# Altium PCB nRF52_UWB_MPU_MPU_new.pcbdoc
Units mil, origin at the board's own origin, x right, y up, seen from the top; angles counter-clockwise.
Board outline 2921.31 x 2303.67 mil, 2 copper layers (Top Layer, Bottom Layer); 31 components, 31 nets, 182 pads, 77 vias.
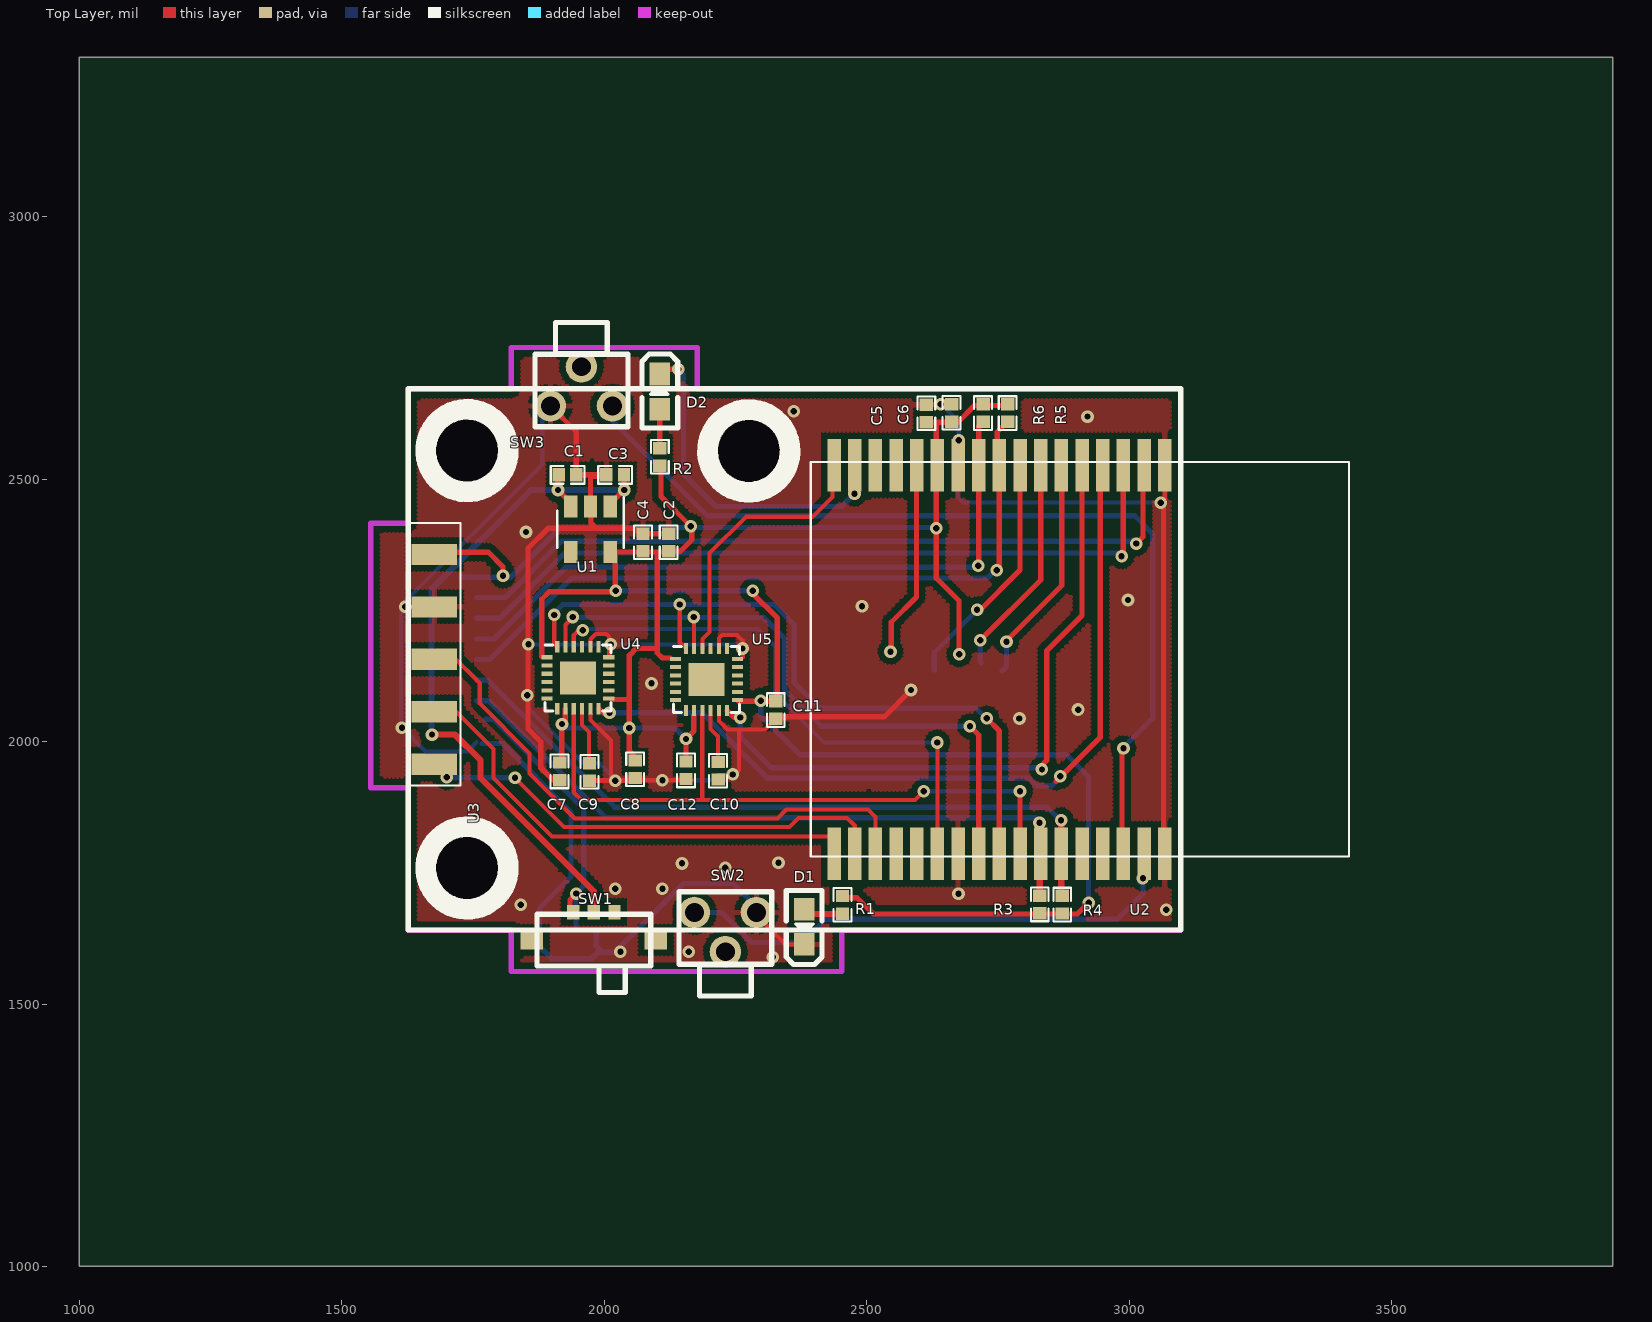
[diagram p0: Top Layer view]
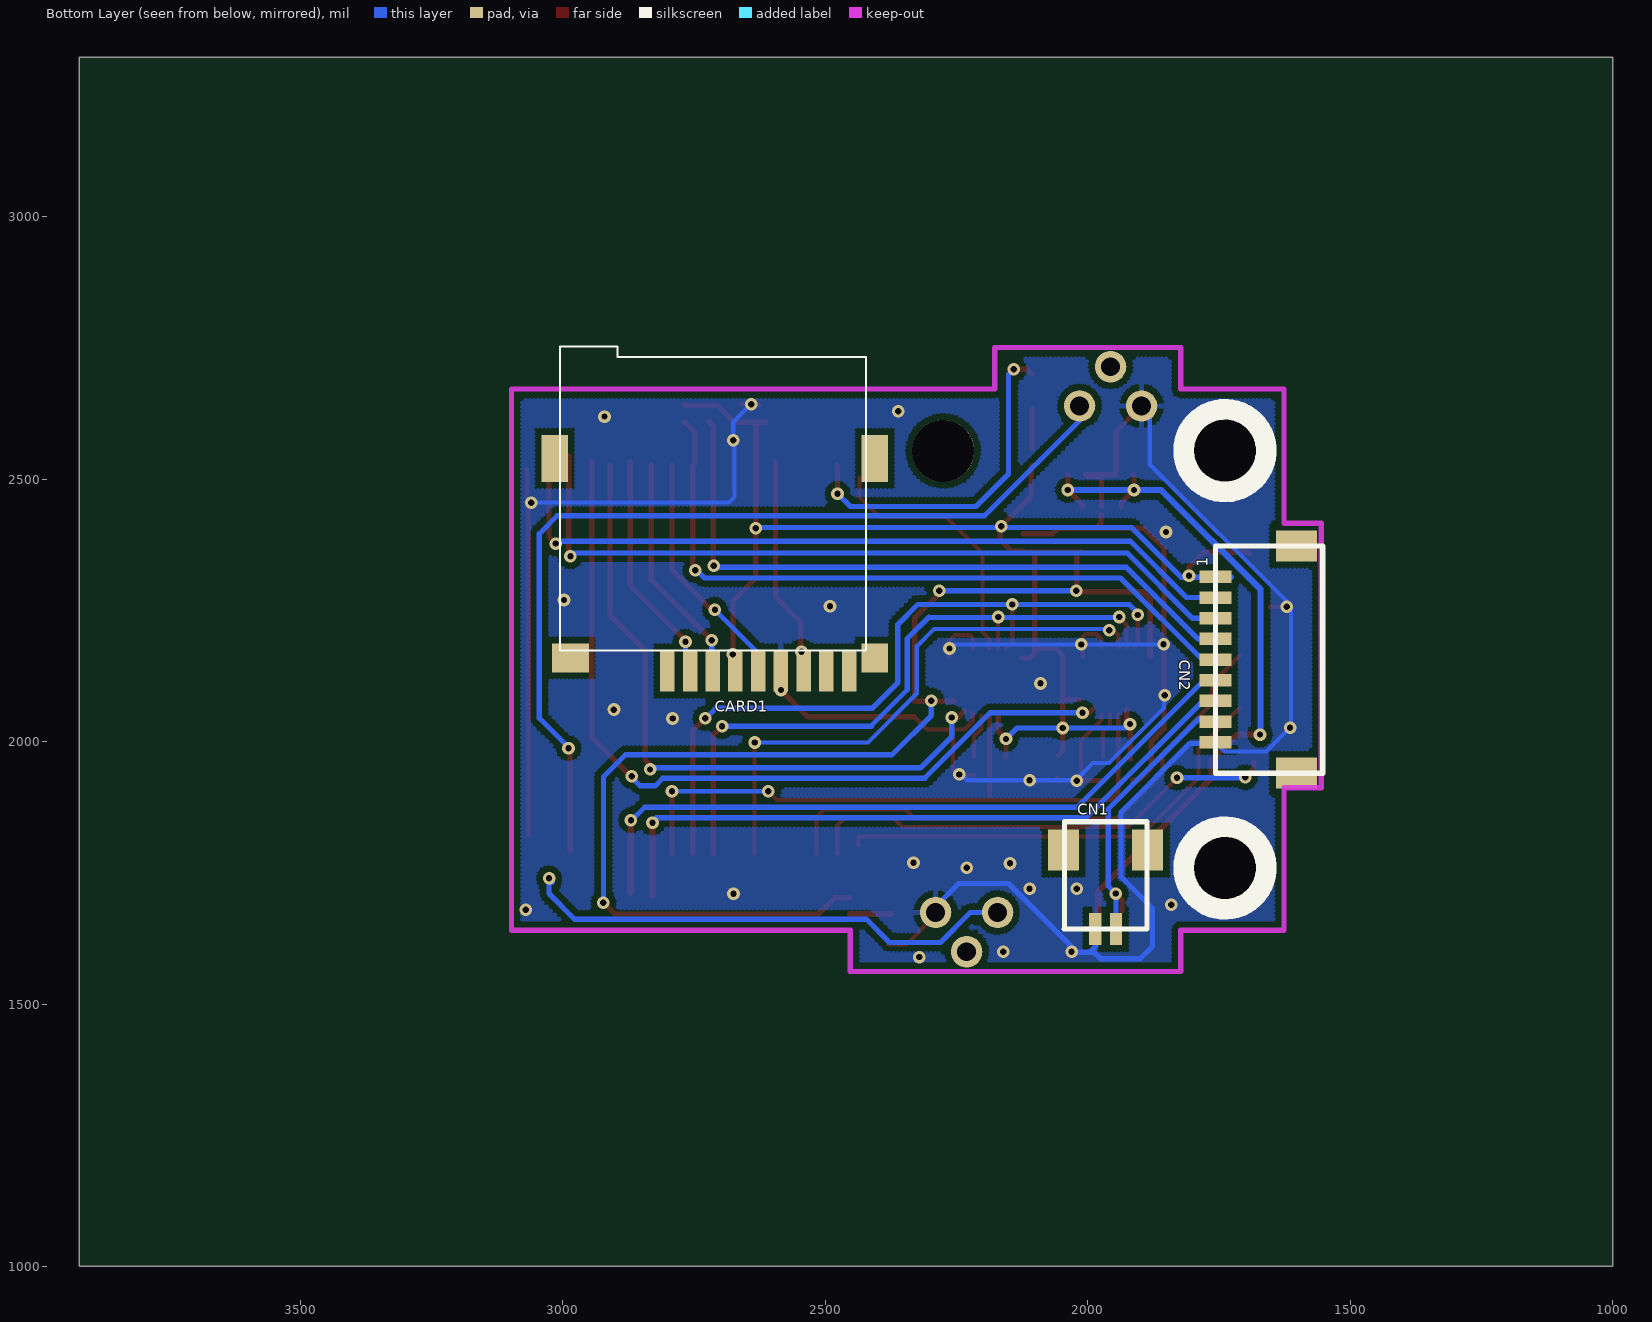
[diagram p1: Bottom Layer view, seen from below]

## Layer stack, top to bottom
Top Layer: signal copper 1.4
Dielectric: dielectric 12.6, FR-4, Dk 4.8
Bottom Layer: signal copper 1.4

## Board outline
3921.31,1000 1000,1000 1000,3303.67 3921.31,3303.67

## Design rules (kind name [scope] priority, off if disabled: settings)
Clearance Clearance_1 [(InPolygon)] p1: gap=11.81
Clearance [All] p2: gap=5.98
ComponentClearance [All] p1 off: gap=10 collisioncheckmode=3 verticalgap=10
PolygonConnect [isvia] p1: connectstyle=Direct reliefconductorwidth=10 reliefentries=4 polygonreliefangle="90 Angle"
RoutingVias [All] p1: holewidth=27.99 width=50 viastyle="Through Hole" minholewidth=11.81 minwidth=23.62 maxholewidth=27.99 maxwidth=50
SolderMaskExpansion [All] p1: expansion=4
TestPointUsage [All] p1: valid=0 allowmultiple=FALSE
Testpoint [All] p1: side=15 testpointundercomponent=TRUE minsize=40 maxsize=100 preferedsize=60 minholesize=0 maxholesize=40 preferedholesize=32 testpointgrid=1 style=1023 order=0123456789
Width Width_2 [InNet('VCC3.3')] p1: maxlimit=100 minlimit=10 preferedwidth=10 minimp=50.000000 maximp=50.000000 favimp=50.000000
Width Width_1 [InNet('VCC3.7')] p2: maxlimit=100 minlimit=10 preferedwidth=10 minimp=50.000000 maximp=50.000000 favimp=50.000000
Width [All] p3: maxlimit=100 minlimit=6 preferedwidth=10 minimp=50.000000 maximp=50.000000 favimp=50.000000
18 further rules are at their usual default settings.

## Components (designator, comment, footprint, x,y, rotation, side; value= is the part's Value field where it differs from the comment)
C1 "10uF" 0402#1 1929.81,2508.41 r180 top
C2 "10uF" 0402#1 2122.81,2379.41 r270 top
C3 "100nF" 0402#1 2020.81,2508.41 r0 top
C4 "100nF" 0402#1 2073.81,2379.41 r270 top
C5 "10uF" 0402#1 2613.81,2625.41 r270 top
C6 "100nF" 0402#1 2661.81,2626.41 r270 top
C7 "10nF" 0402#1 1914.81,1943.41 r90 top
C8 "100nF" 0402#1 2058.81,1947.41 r90 top
C9 "100nF" 0402#1 1971.81,1942.41 r270 top
C10 "100nF" 0402#1 2216.81,1944.41 r270 top
C11 "100nF" 0402#1 2326.81,2060.41 r90 top
C12 "10nF" 0402#1 2155.81,1945.41 r90 top
CARD1 "HYC77-TF09-200" TF-015 2710.81,2337.05 r180 bottom locked
CN1 "A1002WV-S-2P" A1002WR-S-2P_LEO 1965.74,1718.53 r180 bottom
CN2 "A1002WR-S-9P" A1002WR-S-9P_LEO 1680.9,2156.34 r270 bottom
D1 "RED" LED-0603 2380.81,1647.01 r90 top
D2 "GREEN" LED-0603 2105.81,2667.01 r270 top
R1 "1K" 0402#1 2454,1689 r270 top
R2 "200" 0402#1 2105.81,2542.41 r270 top
R3 "10K" 0402#1 2829.81,1689.41 r270 top
R4 "10K" 0402#2 2872.77,1689.17 r270 top
R5 "10K" 0402#1 2768.81,2626.41 r90 top
R6 "10K" 0402#1 2721.81,2626.41 r90 top
SW1 "SSAJ120100" SW-SMD-5.5X2.5 1980.14,1648.43 r0 top
SW2 "KAN4562-0501C" KAN4562-0501C 2230.81,1637.01 r0 top
SW3 "KAN4562-0501C" KAN4562-0501C 1956.51,2677.01 r180 top
U1 "SPX3819M5-L-3-3/TR" SOT-23-5 1973.81,2404.41 r270 top
U2 "DWM1001" DWM1001 2905.41,2156.31 r270 top locked
U3 "GPS_Header" GPS_HEADER_SMT_NEW 1626.34,1641.14 r90 top locked
U4 "MPU-9250" QFN-24-1EP_3X3MM_PITCH0.4MM 1949.81,2121.41 r0 top
U5 "MPU-9250" QFN-24-1EP_3X3MM_PITCH0.4MM 2194.81,2118.41 r0 top

## Footprints (in the part's own frame and the unit in brackets; to place one, negate y for a bottom-side part, rotate by r counter-clockwise, add the part's x,y. Pads: shape width x height; smd on the part's side, far side on the other; paste and mask are expansions set on the pad)
0402#1 [mil]
  rect 23.6x25.6 smd: 1(-16.7,0) 2(16.7,0)
  silkscreen extent -32,-17 32,17
0402#2 [mil]
  rect 23.7x25.6 smd: 1(-16.7,0) 2(16.7,0)
  silkscreen extent -32,-17 32,17
A1002WR-S-2P_LEO [mil]
  rect 23.6x61 smd: 1(-19.77,-75.78) 2(19.63,-75.78)
  rect 59.1x78.8 smd: 3(-80.02,74.97) 4(79.98,74.97)
  silkscreen extent -79,-76 79,129
A1002WR-S-9P_LEO [mil]
  rect 23.6x61 smd: 1(-157.51,-75.71) 2(-118.11,-75.71) 3(-78.61,-75.81) 4(-39.41,-75.71) 5(-0.01,-75.71) 6(39.39,-75.71) 7(78.69,-75.71) 8(118.14,-75.71) 9(157.49,-75.71)
  rect 59.1x78.7 smd: 10(-216.51,78.74)
  rect 59x78.7 smd: 11(216.54,78.74)
  silkscreen extent -217,-76 217,129
DWM1001 [mm]
  rect 2.54x0.65 smd: 1(-9.404,4.129) 2(-9.404,3.129) 3(-9.404,2.129) 4(-9.404,1.129) 5(-9.404,0.129) 6(-9.404,-0.871) 7(-9.404,-1.871) 8(-9.404,-2.871) 9(-9.404,-3.871) 10(-9.404,-4.871) 11(-9.404,-5.871) 12(-9.404,-6.871) 13(-9.404,-7.871) 14(-9.404,-8.871) 15(-9.404,-9.871) 16(-9.404,-10.871) 17(-9.404,-11.871) 18(9.406,-11.871) 19(9.406,-10.871) 20(9.406,-9.871) 21(9.406,-8.871) 22(9.406,-7.871) 23(9.406,-6.871) 24(9.406,-5.871) 25(9.406,-4.871) 26(9.406,-3.871) 27(9.406,-2.871) 28(9.406,-1.871) 29(9.406,-0.871) 30(9.406,0.129) 31(9.406,1.129) 32(9.406,2.129) 33(9.406,3.129) 34(9.406,4.129)
  silkscreen extent -9.56,-13.02 9.54,13.05
GPS_HEADER_SMT_NEW [mm]
  rect 1.02x2.2 smd: 1(18.18,-1.27) 2(15.64,-1.27) 3(13.1,-1.27) 4(10.56,-1.27) 5(8.02,-1.27)
  round 3 hole 3 unplated: ""(3,-2.85) ""(23.2,-2.85)
  silkscreen extent 0,-37.4 26.2,0
KAN4562-0501C [mil]
  round 60 hole 36: 0(0,-37.4) 1(-59.05,37.4) 2(59.06,37.4)
  silkscreen extent -89,-122 89,77
LED-0603 [mil]
  rect 43x39 smd: 1(33.5,0) 2(-33.5,0)
  silkscreen extent -72,-34 70,34
QFN-24-1EP_3X3MM_PITCH0.4MM [mil]
  rect 21.65x7.87 smd: 1(-59.05,39.35) 2(-59.05,23.65) 3(-59.05,7.85) 4(-59.05,-7.85) 5(-59.05,-23.65) 6(-59.05,-39.35) 13(59.05,-39.35) 14(59.05,-23.65) 15(59.05,-7.85) 16(59.05,7.85) 17(59.05,23.65) 18(59.05,39.35)
  rect 7.87x21.65 smd: 7(-39.35,-59.05) 8(-23.65,-59.05) 9(-7.85,-59.05) 10(7.85,-59.05) 11(23.65,-59.05) 12(39.35,-59.05) 19(39.35,59.05) 20(23.65,59.05) 21(7.85,59.05) 22(-7.85,59.05) 23(-23.65,59.05) 24(-39.35,59.05)
  rect 34.45x31.5 smd: 25(-17.1,-15.75) 25(-17.1,15.75) 25(17.15,-15.75) 25(17.15,15.75)
  silkscreen extent -63,-63 63,63
SOT-23-5 [mm]
  rect 1.06x0.65 smd: 1(-1.1,0.95) 2(-1.1,0) 3(-1.1,-0.95) 4(1.1,-0.95) 5(1.1,0.95)
  silkscreen extent -1.55,-1.61 0.9,1.61
SW-SMD-5.5X2.5 [mm]
  rect 0.599x0.701 smd: 1(-0.999,0.675) 2(1,0.675) C(-0.001,0.675)
  rect 1.1x0.9 smd: 4(-2.999,-0.675) 5(3,-0.675)
  silkscreen extent -2.75,-3.22 2.75,0.58
TF-015 [mil]
  rect 27.6x78.8 smd: 1(-90.2,-202.55) 4(39.5,-202.55) 5(82.8,-202.55) 6(126,-202.55) 7(169.2,-202.55) 8(212.4,-202.55) 9(255.9,-202.55)
  rect 27.5x78.7 smd: 2(-46.95,-202.5)
  rect 27.5x78.8 smd: 3(-3.75,-202.55)
  rect 50x55 smd: 10(305,-177.4)
  rect 50x90 smd: 11(305,202.6) 12(-305,202.6)
  rect 70x55 smd: 13(-275,-177.44)
  silkscreen extent -295,-163 288,416

## Free pads (board coordinates)
  round 118.11 hole 118.1 unplated: ""(2275.42,2553.94)

## Via types
v1: diameter 24.02, hole 12.01, Top Layer to Bottom Layer, 70 vias
v2: diameter 24.41, hole 12.01, Top Layer to Bottom Layer, 7 vias

## Nets (pads, with @x,y where several pads share a name; then routed paths per layer and width w, separated by ;. In a path a pad name is that pad's centre, name@x,y a point inside that pad or via, vN(x,y) a via of type N, cw(c..) or ccw(c..) an arc to the next point about the centre after c; other vN are vias at no path point)
BUTTON_RST: SW2.1 U2.33 | length 953.7
  Bottom Layer w10: SW2.1 2223.77,1674.45 2280.81,1617.41 2377.81,1617.41 2421.81,1661.41 2977.81,1661.41 3026.81,1710.41 v1@3026.81,1738.41
  Bottom Layer w11.81: v1@3020.81,1732.41 v1@3026.81,1738.41
  other v1: 3026.46,1739.41
BUTTON_SDCARD: SW3.1 U2.32 | length 1779.5
  Top Layer w10: U2.32@2986.81,1790.41 v1@2986.81,1993.41
  Bottom Layer w10: SW3.1 2015.57,2611.43 2196.59,2430.41 3010.81,2430.41 3045,2396.22 3045,2044.6 v1@2989.81,1989.41
  other v1: 2989.46,1987.41
CHARGE_VC: CN1.2 CN2.8 SW1.1 | length 530.6
  Top Layer w10: SW1.1@1934.81,1677.41 1934.81,1698.41 v1@1946.81,1710.41
  Bottom Layer w10: CN2.8@1773.81,2042.41 1789.81,2042.41 1960.81,1871.41 1960.81,1725.11 1946.11,1710.41 CN1.2
  other v1: 1946.46,1710.41
D2_1: D2.1 R2.1 | length 74.4
  Top Layer w10: R2.1 D2.1@2105.81,2633.55
FOOT_2: CN2.4 R6.1 U2.10 | length 1293.5
  Top Layer w10: v1@2713.56,2332.41 2713.56,2601.46 R6.1
  Bottom Layer w10: CN2.4 1790.15,2195.75 1926.81,2332.41 v1@2712.81,2332.41
  other v1: 2712.81,2335.41
FOOT_5: CN2.5 R5.1 U2.9 | length 1349.4
  Top Layer w10: U2.9@2748.81,2527.41 2748.81,2589.71 R5.1 ; v1@2752.91,2326.41 U2.9@2752.91,2526.55
  Bottom Layer w10: CN2.5 1781.75,2156.35 1937.4,2312 2730.4,2312 v1@2744.81,2326.41
  other v1: 2747.81,2326.41
FOOT_6: CN2.6 R4.1 U2.29 | length 1365.8
  Top Layer w11.81: v1@2869.81,1851.41 2870.81,1850.41 R4.1@2870.81,1711.41
  Bottom Layer w10: CN2.6 1778.27,2116.95 2020.22,1875 2844.22,1875 v1@2870.81,1848.41
  other v1: 2870.46,1850.41
FOOT_7: CN2.7 R3.1 U2.28 | length 1310.7
  Top Layer w11.81: R3.1 v1@2829.81,1845.41
  Bottom Layer w10: CN2.7 1780.57,2077.65 2003.22,1855 2822.22,1855 v1@2831.81,1845.41
  other v1: 2829.46,1845.41
GND: C1.1 C2.1 C3.1 C4.1 C5.1 C6.1 C7.1 C8.1 C9.2 C10.2 C11.1 C12.1 CARD1.6 CN1.1 CN2.9 D1.2 SW2.2 SW3.2 U1.2 U2.1 U2.11 U2.24 U2.34 U3.2 U4.11 U4.18 U4.20 U5.11 U5.18 U5.20 | length 6577.8
  Top Layer w7.87: v1@1614.81,2026.41 v1@1615.81,2027.41 ; v1(1621,2257) U3.2@1653,2257 ; U4.20 1973.46,2195.06 1983.81,2205.41 2003.81,2205.41 2008.81,2200.41 U4.18@2008.81,2161.41 ; U4.11@1973.81,2052.41 1973.81,2041.41 2012.81,2002.41 v1@2012.81,1925.71 ; C8.1@2062.81,1926.41 C12.1@2165.81,1926.41 ; C10.2@2216.81,1936.71 2248.11,1936.71 2256.81,1945.41 2256.81,2023 ; U5.20 2218.46,2197.06 2224.81,2203.41 2252.81,2203.41 2263.81,2192.41 U5.18@2263.81,2160.41 ; U5.11@2218.71,2054.69 2218.71,2039.51 2235.22,2023 2306.4,2023 C11.1@2330.81,2047.41 ; SW2.2@2294.81,1664.41 2345.67,1613.55 D1.2@2380.81,1613.55 ; C5.1@2624.81,2640.41 2627.51,2643.11 C6.1 ; U2.11@2673.81,2576.41 2675.81,2574.41 U2.11@2675.81,2480.41 ; v1@3060.81,2454.41 3068.81,2462.41 U2.1@3068.81,2519.41
  Top Layer w10: SW3.2@1897.46,2639.65 1946.51,2590.6 C1.1 C3.1 2001.11,2505.41 1972.81,2505.41 1973.81,2504.41 U1.2 ; C7.1 1902.51,1926.71 1878.81,1950.41 1878.81,2000.41 1854.81,2024.41 1854.81,2368.41 1892.81,2406.41 2056.81,2406.41 2067.11,2396.11 C2.1 ; C9.2 2053.81,1925.71 C8.1 ; U1.2@1973.81,2432.41 1974.81,2431.41 1974.81,2416.41 1984.81,2406.41 ; C11.1@2330.81,2047.41 2533.81,2047.41 v1@2584.81,2098.41 ; v1(3060.46,2455.41) 3065.81,2450.06 U2.34@3065.81,1821.41
  Bottom Layer w7.87: CN2.9 1739.17,1981.41 1659.81,1981.41 1612.81,2028.41 1612.81,2259.41 1881.81,2528.41 1881.81,2624 SW3.2@1897.46,2639.65 ; v1@1853.81,2088.41 1854.58,2087.64 1854.58,2064.41 1959.58,1959.41 1989.81,1959.41 2022.81,1926.41 2229.81,1926.41 v1@2241.81,1938.41 ; v1@1855.81,2185.41 2255.46,2185.41 v1(2263.46,2177.41) ; v1(2641.46,2643.11) 2675.46,2609.11 v1(2675.46,2574.41) 2672.81,2571.76 2672.81,2466.41 2683.81,2455.41 v1(3060.46,2455.41)
  Bottom Layer w10: CN2.9@1766.81,1996.41 1805.81,1996.41 1936.81,1865.41 1936.81,1742.41 1876.81,1682.41 1876.81,1609.41 1899.81,1586.41 1975.81,1586.41 1987.81,1598.41 2019.81,1598.41 2150.81,1729.41 2245.81,1729.41 SW2.2@2290.81,1684.41 ; CN1.1@1984.81,1639.41 1984.81,1610.41 1996.81,1598.41 ; SW2.2@2281.81,1655.41 SW2.2@2288.81,1662.41
  other v1: 2320.81,1589.41 2030.81,1599.41 2160.81,1599.41 3070.81,1679.41 1840.81,1689.41 2675,1710 2020.81,1719.41 2110.81,1719.41 2230.81,1759.41 2020.81,1925.71 2110.81,1926.41 2244.9,1937.5 1614.46,2026.41 1853.46,2088.41 2584.46,2098.41 1855.46,2185.41 2012.54,2185.23 1850.81,2399.41 2920.81,2619.41 2360.81,2629.41
  other v2: 2148,1768 2332,1769 2791,2044 2902.99,2060.98 2090,2111 2491,2258 2998,2270
GPS_1PPS: U2.19 U3.5 | length 916.1
  Top Layer w7.87: v1@1834.81,1926.19 1923.59,1837.41 2352.81,1837.41 2369.81,1854.41 2462.81,1854.41 2477.31,1839.91 U2.19@2477.31,1786.05
  Top Layer w10: U3.5@1683,1961 1683,1949 v1(1700,1932)
  Bottom Layer w10: v1@1697,1933 1699,1931 v1(1830,1931)
GPS_UART_RX: U2.18 U3.4 | length 877.8
  Top Layer w7.87: U3.4@1710,2065 1789,1986 1789,1931 1900.59,1819.41 2436.81,1819.41 U2.18@2436.81,1802.41
GPS_UART_TX: U2.20 U3.3 | length 1065
  Top Layer w7.87: U3.3@1709,2165 1762.81,2111.19 1762.81,2072.41 1857.81,1977.41 1857.81,1939.41 1943.81,1853.41 2329.81,1853.41 2346.81,1870.41 2502.81,1870.41 2516.71,1856.51 U2.20@2516.71,1786.05
INT_IMUA: U2.4 U4.12 | length 1593
  Top Layer w10: U4.12@1990.44,2062.36 1997.8,2055 v1(2010,2055) ; 2861,1924 2945,2008 U2.4@2945,2534
  Bottom Layer w10: v1(2010,2055) 2186,2055 2310.8,1930.2 2809.8,1930.2 2824,1916 2853,1916 v1@2870.72,1933.72
  other v1: 2869,1934
INT_IMUB: U2.5 U5.12 | length 1262.1
  Top Layer w10: U5.12 2247.52,2046 v1@2250,2046 ; v1@2830,1951 2843,1964 2843,2173 2910.48,2240.48 U2.5
  Bottom Layer w10: v1(2259,2046) 2259,2010 2319,1950 v1@2830,1950
  other v1: 2834,1947
LED_R: D2.2 U2.16 | length 658.3
  Top Layer w10: D2.2@2105.81,2700.55 2114.67,2709.41 v1(2140.81,2709.41) ; v1(2476.81,2472.41) 2476.81,2526.05 U2.16@2477.31,2526.55
  Bottom Layer w10: v1(2140.81,2709.41) 2150.81,2699.41 2150.81,2510.19 2213,2448 2452.4,2448 v1(2476.81,2472.41)
MPU92_CLK: U2.25 U4.23 U5.23 | length 1269.6
  Top Layer w7.87: U4.23 1926.16,2222.76 v1@1939.81,2236.41 ; U5.23 v1@2171.16,2237.41
  Top Layer w10: v1(2696.81,2029.41) 2713.56,2012.66 U2.25
  Bottom Layer w10: v1@1939.81,2236.41 2300.56,2236.41 ; 2302.56,2237.41 2343.81,2196.16 2343.81,2098.95 2412.58,2030.18 ; 2412.58,2029.41 v1(2696.81,2029.41)
  other v1: 1939.81,2237.41 2170.81,2237.41
MPU92_MISO: U2.27 U4.9 U5.9 | length 1293.1
  Top Layer w7.87: 1941.81,2051.41 1941.81,1903.41 1956.81,1888.41 2591.81,1888.41 v1(2608.81,1905.41) ; 2186.81,1888.41 U5.9@2186.81,2050.41
  Top Layer w10: U2.27@2792.31,1786.05 v1(2792.31,1905.41)
  Bottom Layer w7.87: v1(2608.81,1905.41) v1(2792.31,1905.41)
MPU92_MOSI: U2.26 U4.24 U5.24 | length 1416.8
  Top Layer w7.87: v1(1904.81,2241.41) 1904.81,2186.11 U4.24 ; v1@2143.81,2269.41 2143.81,2189.06 2155.41,2177.46 U5.24
  Top Layer w10: v1(2728.81,2044.41) 2752.91,2020.31 U2.26@2752.91,1786.05
  Bottom Layer w10: v1@1902.81,2243.41 1920.81,2261.41 2323.81,2261.41 2361.81,2223.41 2361.81,2112.41 2410.81,2063.41 2708.81,2063.41 2727.81,2044.41 v1(2728.81,2044.41)
  other v1: 2143.81,2261.41
MPU92_NCS: U2.23 U4.22 | length 1076.8
  Top Layer w7.87: U4.22 1941.96,2203.1 1953.27,2214.41 v1@1960.81,2214.41 ; U2.23@2634.81,1786.05 v1(2634.81,1998.41)
  Bottom Layer w7.87: v1@1958.81,2214.41 2293.03,2214.41 2325.81,2181.63 2325.81,2091.5 2418.9,1998.41 v1(2634.81,1998.41)
  other v1: 1958.81,2212.41
MPU92B_NCS: U2.17 U5.22 | length 503
  Top Layer w7.87: U5.22 2186.96,2195.34 2200.81,2209.19 2200.81,2359.41 2269.81,2428.41 2396.81,2428.41 2434.81,2466.41 U2.17@2434.81,2503.41
R1_2: D1.1 R1.2 | length 77
  Top Layer w11.81: D1.1@2375.81,1671.41 R1.2@2452.81,1671.41
SDCARD_CLK: CARD1.5 U2.8 | length 459.6
  Top Layer w10: v1@2713.81,2248.41 2792.31,2326.91 U2.8@2792.31,2526.55
  Bottom Layer w10: CARD1.5@2628.81,2136.41 2628.81,2169.41 v1@2710.81,2251.41
  other v1: 2710.46,2251.41
SDCARD_MISO: CARD1.7 U2.13 | length 383.1
  Top Layer w10: v1@2543.81,2172.41 2546.81,2175.41 2546.81,2227.41 2594.81,2275.41 U2.13@2594.81,2534.41
  other v1: 2545.46,2171.41
SDCARD_MOSI: CARD1.3 U2.7 | length 424.3
  Top Layer w10: v1@2716.81,2193.41 2831.71,2308.31 U2.7
  Bottom Layer w10: v1(2716.46,2193.41) 2716.46,2151.76 CARD1.3@2717.81,2150.41
SDCARD_NCS: CARD1.2 U2.6 | length 446.8
  Top Layer w10: v1@2764.81,2190.41 2871.81,2297.41 U2.6@2871.81,2533.41
  Bottom Layer w10: CARD1.2 2766.46,2143.25 v1(2766.46,2190.41)
SWD_CLK: CN2.2 U2.2 | length 1473.7
  Top Layer w10: v1(3013.81,2377.41) 3026.81,2390.41 U2.2@3026.81,2541.41
  Bottom Layer w10: CN2.2 1811.57,2274.45 1919.12,2382 v1@3007.1,2382 ; v1@3007.22,2384 v1(3013.81,2377.41)
SWD_DIO: CN2.3 U2.3 | length 1471.7
  Top Layer w10: v1@2988.81,2353.41 U2.3@2988.81,2544.41
  Bottom Layer w10: CN2.3 1800.35,2234.95 1924.81,2359.41 v1@2985.81,2359.41
  other v1: 2985.81,2353.41
U4_10: C9.1 U4.10 | length 88.7
  Top Layer w7.87: U4.10@1957.71,2052.69 1957.71,2031.51 1970.81,2018.41 C9.1@1970.81,1969.41
U5_10: C10.1 U5.10 | length 84.4
  Top Layer w7.87: U5.10@2202.71,2048.69 2202.71,2024.21 2216.81,2010.11 C10.1@2216.81,1970.11
VCC3.3: C2.2 C4.2 C5.2 C6.2 C7.2 C8.2 C11.2 C12.2 CARD1.4 CN2.1 R1.1 R2.2 R3.2 R4.2 R5.2 R6.2 U1.5 U2.12 U3.1 U4.1 U4.8 U4.13 U5.1 U5.8 U5.13 | length 5336.4
  Top Layer w7.87: v1@1918.81,2025.41 v1@1925.81,2032.41
  Top Layer w10: U3.1@1692,2359 1694,2361 1779,2361 1807,2333 v1(1807,2316) ; U4.1@1880.81,2162.41 1880.81,2271.41 1894.81,2285.41 2020.81,2285.41 U1.5@2020.81,2361.11 ; C7.2@1918.81,1967.41 v1@1918.81,2025.41 ; v1@1925.81,2032.41 U4.8@1925.81,2062.36 ; U1.5 2121.21,2361.11 C2.2 2145.11,2362.71 2166.81,2384.41 2166.81,2408.41 2108.11,2467.11 2108.11,2523.41 R2.2 ; U4.13@2014.81,2080.41 2046.11,2080.41 2047.81,2082.11 ; C8.2@2055.81,1974.11 2047.81,1982.11 2047.81,2164.41 2060.81,2177.41 2100.81,2177.41 ; 2100.81,2360.11 2100.81,2169.41 2110.81,2159.41 U5.1@2125.81,2159.41 ; C12.2@2155.81,1971.11 v1(2155.81,2005.11) 2170.71,2020.01 U5.8@2170.71,2049.69 ; U5.13@2254.97,2077.95 2255.81,2077.11 2329.81,2077.11 2329.81,2235.41 v1@2281.81,2283.41 ; R1.1@2454,1702.41 2481.81,1702.41 2512.81,1671.41 2901.41,1671.41 v1(2923,1693) ; v1@2676.81,2166.41 2675.81,2167.41 2675.81,2268.41 2632.81,2311.41 2632.81,2606.41 2634.81,2608.41 2614.11,2608.41 C5.2 2674.11,2608.71 2705.81,2640.41 2766.11,2640.41 R5.2
  Bottom Layer w10: 1725.81,2313.41 1822.24,2313.41 1916.83,2408 2627.22,2408 v1@2633.81,2401.41 ; v1(1919.46,2033.41) 1926.87,2026 2134.92,2026 v1(2155.81,2005.11) ; v1@2024.35,2287.41 v1(2282.81,2287.41) ; v1(2298,2078) 2298,2050 2373,1975 2881,1975 2923,1933 v1(2923,1693)
  other v1: 2047.81,2026 2676.46,2166.41 2021.81,2287.41 2632.81,2406.41 2164.81,2410.41
VCC3.7: C1.2 C3.2 SW1.C U1.1 U1.3 | length 1483.3
  Top Layer w10: C1.2 1911.81,2507.11 v1(1911.81,2479.41) 1936.41,2454.81 U1.3 ; U1.1 2011.21,2452.81 v1(2037.81,2479.41) 2037.81,2508.11 C3.2
  Top Layer w11.81: v1(1671.81,2013.41) 1715.59,2013.41 1764,1965 1764,1931 1980.1,1714.9 SW1.C
  Bottom Layer w10: v1(1911.81,2479.41) v1(2037.81,2479.41)
  Bottom Layer w11.81: v1@1670.81,2013.41 1670.81,2290.41 1859.81,2479.41 v1(2037.81,2479.41)
pads on no net: CARD1.1 CARD1.8 CARD1.9 CARD1.10 CARD1.11 CARD1.12 CARD1.13 CN1.3 CN1.4 CN2.10 CN2.11 SW1.2 SW1.4 SW1.5 SW2.0 SW3.0 U1.4 U2.14 U2.15 U2.21 U2.22 U2.30 U2.31 U3. U4.2 U4.3 U4.4 U4.5 U4.6 U4.7 U4.14 U4.15 U4.16 U4.17 U4.19 U4.21 U4.25 U5.2 U5.3 U5.4 U5.5 U5.6 U5.7 U5.14 U5.15 U5.16 U5.17 U5.19 U5.21 U5.25

## Polygon pours and split planes (outlines as drawn)
GND on Top Layer (hatched 90Degree grid 7.87 track 7.87, remove dead copper): 1499,2772 3143,2772 3143,1534 1532,1534
GND on Bottom Layer (hatched 90Degree grid 7.87 track 7.87, remove dead copper): 1620,2749 3110,2749 3110,1530 1532,1530 1532,2737

## Silkscreen, mask and mechanical layers (free items; w line width, h text height)
Top Overlay:
  lines w39.37: 2354.08,2550.45 cw(c2275.42,2554) 2354.16,2553.94

## Text inside footprints (layer, text, board x,y; h text height)
CN2: Bottom Overlay "1" at 1764.1,2333.51 h35.43 r270
U3: Document "26.2" at 1580.02,2432.47 h80 r90; Document "37.4" at 2377.73,1580 h80 r180